# EAGLE board Ref_pcb (EAGLE 8.5.0)
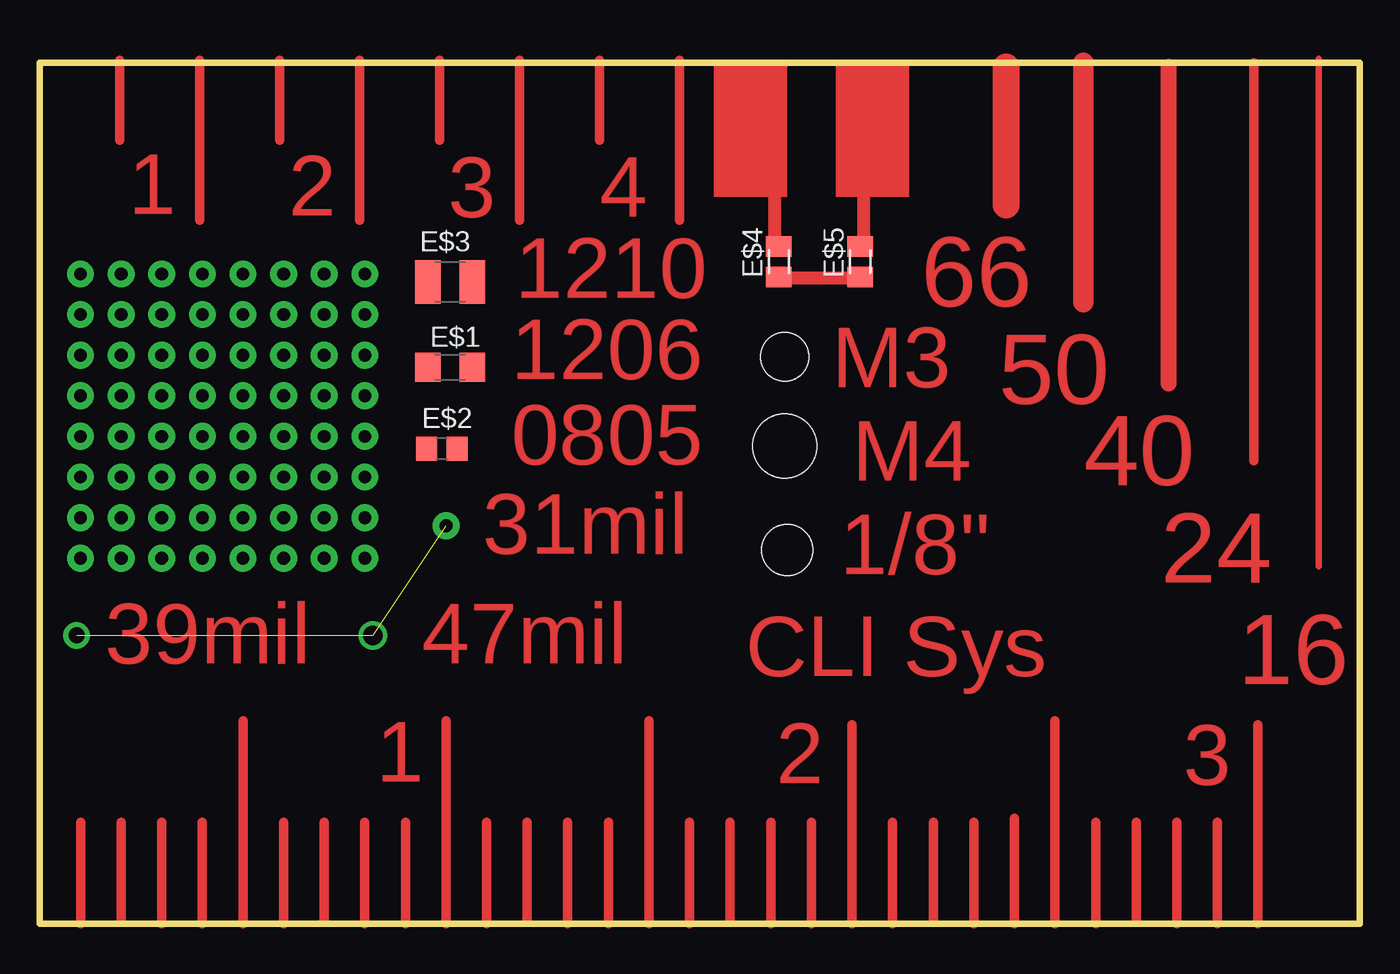
[diagram p0: board, top side]

Size 82.55 x 53.85 mm. Coordinates in mm from the lower left corner, seen from the top.
Outline: 0,0 0,53.85 82.55,53.85 82.55,0 0,0
Copper layers (1*16): Top 0.035mm / dielectric 1.5mm / Bottom 0.035mm
Design rules "default": minimum track width 10mil, minimum drill 24mil, track to track 8mil, track to pad 8mil, pad to pad 8mil, via to via 8mil, smd to smd 8mil, copper to edge 40mil, drill to drill 8mil, minimum pad ring 10mil, minimum via ring 8mil, stop-mask expansion 4mil, vias tented up to drill 0mil, thermal gap 10mil
Holes 3.17 mm at 46.74,23.37
Holes 3 mm at 46.6,35.46
Holes 4 mm at 46.6,29.87
Milling: 8 lines

## Footprints (pad centres in the part's own frame; a part is rotated, then mirrored left to right if it is on the bottom)
C1206 = smd 1.6 x 1.8: 1 -1.4,0; 2 1.4,0
C0805 = smd 1.3 x 1.5: 1 -0.95,0; 2 0.95,0
C1210 = smd 1.6 x 2.7: 1 -1.4,0; 2 1.4,0
M0805 = smd 1.3 x 1.6: 1 -0.95,0; 2 0.95,0

## Placement (x,y rotation side)
E$1  [C1206]  25.65,34.8 0 top
E$2  [C0805]  25.15,29.72 0 top
E$3  [C1210]  25.65,40.13 0 top
E$4  [M0805]  46.23,41.4 90 top
E$5  [M0805]  51.31,41.4 90 top

## Library data of the parts
E$1-E$3 = rcl
E$4 E$5 = acg_library

## Tracks (layer width: path | path; a pad name or v marks a point on that pad's centre or on a via)
S$1
  Top 0.61: 2.54,0 2.54,6.35
S$2
  Top 0.61: 5.08,0.25 5.08,6.35
S$3
  Top 0.61: 7.62,0 7.62,6.35
S$4
  Top 0.61: 10.16,0 10.16,6.35
S$5
  Top 0.61: 12.7,0 12.7,12.7
S$6
  Top 0.61: 15.24,0 15.24,6.35
S$7
  Top 0.61: 17.78,0.25 17.78,6.35
S$8
  Top 0.61: 20.32,0 20.32,6.35
S$9
  Top 0.61: 22.86,0 22.86,6.35
S$10
  Top 0.61: 25.4,0 25.4,12.7
S$11
  Top 0.61: 27.94,0 27.94,6.35
S$12
  Top 0.61: 30.48,0.25 30.48,6.35
S$13
  Top 0.61: 33.02,0 33.02,6.35
S$14
  Top 0.61: 35.56,0 35.56,6.35
S$15
  Top 0.61: 38.1,0 38.1,12.7
S$16
  Top 0.61: 40.64,0 40.64,6.35
S$17
  Top 0.61: 43.18,0.25 43.18,6.35
S$18
  Top 0.61: 45.72,0 45.72,6.35
S$19
  Top 0.61: 48.26,0 48.26,6.35
S$20
  Top 0.61: 50.8,0 50.8,12.45
S$21
  Top 0.61: 53.34,0 53.34,6.35
S$22
  Top 0.61: 55.88,0.25 55.88,6.35
S$23
  Top 0.61: 58.42,0 58.42,6.35
S$24
  Top 0.61: 60.96,0 60.96,6.6
S$25
  Top 0.61: 63.5,0 63.5,12.7
S$26
  Top 0.61: 66.04,0 66.04,6.35
S$27
  Top 0.61: 68.58,0.25 68.58,6.35
S$28
  Top 0.61: 71.12,0 71.12,6.35
S$29
  Top 0.61: 73.66,0 73.66,6.35
S$30
  Top 0.61: 76.2,0 76.2,12.45
S$31
  Top 0.61: 5,49 5,54
S$32
  Top 0.61: 10,44 10,54
S$33
  Top 0.61: 15,49 15,54
S$34
  Top 0.61: 20,44 20,54
S$35
  Top 0.61: 25,49 25,54
S$36
  Top 0.61: 30,44 30,54
S$37
  Top 0.61: 35,49 35,54
S$38
  Top 0.61: 40,44 40,54
S$39
  Top 1.27: 65.28,38.86 65.28,53.85
S$40
  Top 1.676: 60.45,44.96 60.45,53.59
S$41
  Top 0.406: 80.01,22.35 80.01,54.1
S$42  (via drill 0.8 pad 1.68, 1 pad 1.68, 1.2 pad 1.68)  (2 unrouted)
  other vias: 25.4,24.89 2.29,18.03 20.83,18.03
S$43  (via drill 0.8 pad 1.68)
  other vias: 2.54,40.64
S$44  (via drill 0.8 pad 1.68)
  other vias: 5.08,40.64
S$45  (via drill 0.8 pad 1.68)
  other vias: 7.62,40.64
S$46  (via drill 0.8 pad 1.68)
  other vias: 10.16,40.64
S$47  (via drill 0.8 pad 1.68)
  other vias: 12.7,40.64
S$48  (via drill 0.8 pad 1.68)
  other vias: 15.24,40.64
S$49  (via drill 0.8 pad 1.68)
  other vias: 17.78,40.64
S$50  (via drill 0.8 pad 1.68)
  other vias: 20.32,40.64
S$51
  Top 0.8: 45.97,42.42 45.97,46.74
S$52
  Top 0.8: 46.23,40.39 51.31,40.39
S$53  (via drill 0.8 pad 1.68)
  other vias: 2.54,38.1
S$54  (via drill 0.8 pad 1.68)
  other vias: 5.08,38.1
S$55  (via drill 0.8 pad 1.68)
  other vias: 7.62,38.1
S$56  (via drill 0.8 pad 1.68)
  other vias: 10.16,38.1
S$57  (via drill 0.8 pad 1.68)
  other vias: 12.7,38.1
S$58  (via drill 0.8 pad 1.68)
  other vias: 15.24,38.1
S$59  (via drill 0.8 pad 1.68)
  other vias: 17.78,38.1
S$60  (via drill 0.8 pad 1.68)
  other vias: 20.32,38.1
S$61
  Top 0.8: 51.56,42.67 51.56,46.23
S$63  (via drill 0.8 pad 1.68)
  other vias: 2.54,35.56
S$64  (via drill 0.8 pad 1.68)
  other vias: 5.08,35.56
S$65  (via drill 0.8 pad 1.68)
  other vias: 7.62,35.56
S$66  (via drill 0.8 pad 1.68)
  other vias: 10.16,35.56
S$67  (via drill 0.8 pad 1.68)
  other vias: 12.7,35.56
S$68  (via drill 0.8 pad 1.68)
  other vias: 15.24,35.56
S$69  (via drill 0.8 pad 1.68)
  other vias: 17.78,35.56
S$70  (via drill 0.8 pad 1.68)
  other vias: 20.32,35.56
S$73  (via drill 0.8 pad 1.68)
  other vias: 2.54,33.02
S$74  (via drill 0.8 pad 1.68)
  other vias: 5.08,33.02
S$75  (via drill 0.8 pad 1.68)
  other vias: 7.62,33.02
S$76  (via drill 0.8 pad 1.68)
  other vias: 10.16,33.02
S$77  (via drill 0.8 pad 1.68)
  other vias: 12.7,33.02
S$78  (via drill 0.8 pad 1.68)
  other vias: 15.24,33.02
S$79  (via drill 0.8 pad 1.68)
  other vias: 17.78,33.02
S$80  (via drill 0.8 pad 1.68)
  other vias: 20.32,33.02
S$83  (via drill 0.8 pad 1.68)
  other vias: 2.54,30.48
S$84  (via drill 0.8 pad 1.68)
  other vias: 5.08,30.48
S$85  (via drill 0.8 pad 1.68)
  other vias: 7.62,30.48
S$86  (via drill 0.8 pad 1.68)
  other vias: 10.16,30.48
S$87  (via drill 0.8 pad 1.68)
  other vias: 12.7,30.48
S$88  (via drill 0.8 pad 1.68)
  other vias: 15.24,30.48
S$89  (via drill 0.8 pad 1.68)
  other vias: 17.78,30.48
S$90  (via drill 0.8 pad 1.68)
  other vias: 20.32,30.48
S$93  (via drill 0.8 pad 1.68)
  other vias: 2.54,27.94
S$94  (via drill 0.8 pad 1.68)
  other vias: 5.08,27.94
S$95  (via drill 0.8 pad 1.68)
  other vias: 7.62,27.94
S$96  (via drill 0.8 pad 1.68)
  other vias: 10.16,27.94
S$97  (via drill 0.8 pad 1.68)
  other vias: 12.7,27.94
S$98  (via drill 0.8 pad 1.68)
  other vias: 15.24,27.94
S$99  (via drill 0.8 pad 1.68)
  other vias: 17.78,27.94
S$100  (via drill 0.8 pad 1.68)
  other vias: 20.32,27.94
S$103  (via drill 0.8 pad 1.68)
  other vias: 2.54,25.4
S$104  (via drill 0.8 pad 1.68)
  other vias: 5.08,25.4
S$105  (via drill 0.8 pad 1.68)
  other vias: 7.62,25.4
S$106  (via drill 0.8 pad 1.68)
  other vias: 10.16,25.4
S$107  (via drill 0.8 pad 1.68)
  other vias: 12.7,25.4
S$108  (via drill 0.8 pad 1.68)
  other vias: 15.24,25.4
S$109  (via drill 0.8 pad 1.68)
  other vias: 17.78,25.4
S$110  (via drill 0.8 pad 1.68)
  other vias: 20.32,25.4
S$113  (via drill 0.8 pad 1.68)
  other vias: 2.54,22.86
S$114  (via drill 0.8 pad 1.68)
  other vias: 5.08,22.86
S$115  (via drill 0.8 pad 1.68)
  other vias: 7.62,22.86
S$116  (via drill 0.8 pad 1.68)
  other vias: 10.16,22.86
S$117  (via drill 0.8 pad 1.68)
  other vias: 12.7,22.86
S$118  (via drill 0.8 pad 1.68)
  other vias: 15.24,22.86
S$119  (via drill 0.8 pad 1.68)
  other vias: 17.78,22.86
S$120  (via drill 0.8 pad 1.68)
  other vias: 20.32,22.86
S$123
  Top 0.61: 75.95,28.96 75.95,53.85
S$124
  Top 1.016: 70.61,33.78 70.61,53.59
(copper drawn outside any net)
  shapes: Top area x2

## Text on the board
Top: 1 | 2 | 3 | 4 | 1210 | 66 | 1206 | M3 | 50 | 0805 | M4 | 40 | 31mil | 1/8" | 24 | 39mil | 47mil | CLI Sys | 16 | 1 | 2 | 3